# EAGLE board LDR  PCB (EAGLE 9.7.0)
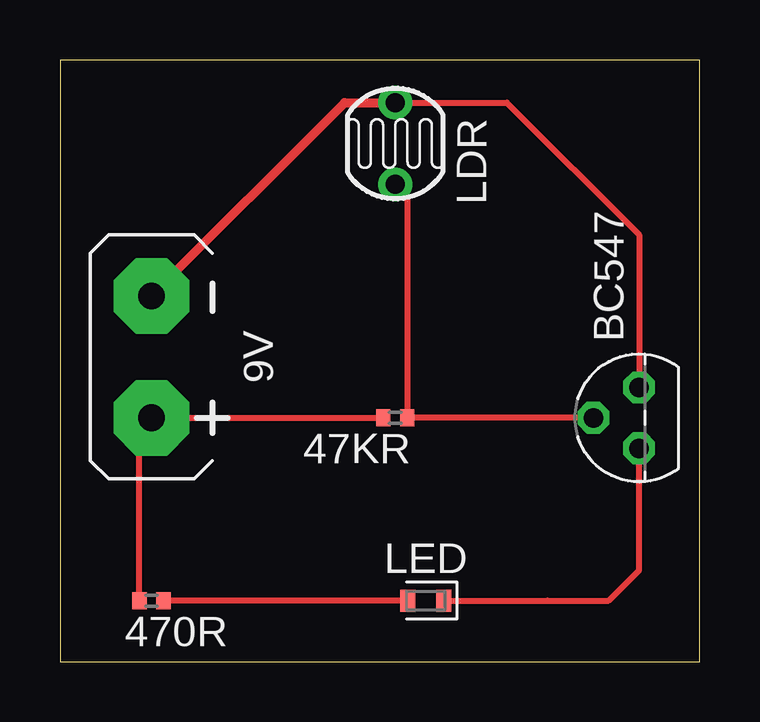
[diagram p0: board, top side]

Size 26.65 x 25.07 mm. Coordinates in mm from the lower left corner, seen from the top.
Outline: 0,0 26.65,0 26.65,25.07 0,25.07 0,0
Copper layers (1*16): Top 0.035mm / dielectric 1.5mm / Bottom 0.035mm
Design rules "Fusion Electronics Design Rules": minimum track width 6mil, minimum drill 0.35mm, track to track 6mil, track to pad 6mil, pad to pad 6mil, via to via 6mil, smd to smd 6mil, copper to edge 40mil, drill to drill 6mil, minimum pad ring 10mil, minimum via ring 8mil, stop-mask expansion 4mil, vias tented up to drill 9999mil, thermal gap 10mil

## Footprints (pad centres in the part's own frame; a part is rotated, then mirrored left to right if it is on the bottom)
BATTERY-GENERIC = drill 1.118 pad 3.15 octagon: + 2.54,0; - -2.54,0
R0402 = smd 0.6 x 0.7: 1 -0.5,0; 2 0.5,0
TO92 = drill 0.813 octagon: 1 1.27,0; 2 0,1.905; 3 -1.27,0
GL5528 = drill 0.8 pad 1.4: 1 -1.702,0; 2 1.702,0
LEDC1608X65N_RND-R = smd 0.612 x 0.912: A 0.75,0; C -0.75,0

## Placement (x,y rotation side)
9V  BATTERY-9VGENERIC  [BATTERY-GENERIC]  3.81,12.7 270 top
47KR  47K  [R0402]  13.97,10.16 180 top
470R  470  [R0402]  3.81,2.54 180 top
BC547  BC547  [TO92]  24.13,10.16 90 top
LDR  PHOTOCELL_GL5528  [GL5528]  13.97,21.59 90 top
LED  CHIP-ROUND-R_0603  [LEDC1608X65N_RND-R]  15.24,2.54 180 top

## Library data of the parts
9V LDR = Tinkercad
47KR 470R = rcl; SPICEPREFIX: R
BC547 = transistor
LED = LED; CATEGORY: LED; COLOR: Red; DESCRIPTION: Red LED Indication 0603 (1608 Metric); PACKAGE_SIZE: 0603; PACKAGE_TYPE: SMD; SUBCATEGORY: Chip LED; TYPE: Square with Domed Top

## Nets
N$1: 9V.- BC547.1 LDR.2
N$3: 47KR.1 BC547.2 LDR.1
N$4: BC547.3 LED.C
N$5: 470R.1 LED.A
N$6: 9V.+ 47KR.2 470R.2

## Tracks (layer width: path | path; a pad name or v marks a point on that pad's centre or on a via)
N$1
  Top 0.254: BC547.1 24.13,17.78 18.62,23.29 LDR.2
  Top 0.381: 9V.- 11.86,23.29 LDR.2
N$3
  Top 0.254: LDR.1 14.47,19.39 47KR.1 BC547.2
N$4
  Top 0.254: LED.C 20.32,2.54 22.86,2.54 24.13,3.81 BC547.3
N$5
  Top 0.254: LED.A 470R.1
N$6
  Top 0.254: 47KR.2 9V.+ 3.31,9.66 470R.2